# EAGLE board jumper_bed (EAGLE 9.6.2)
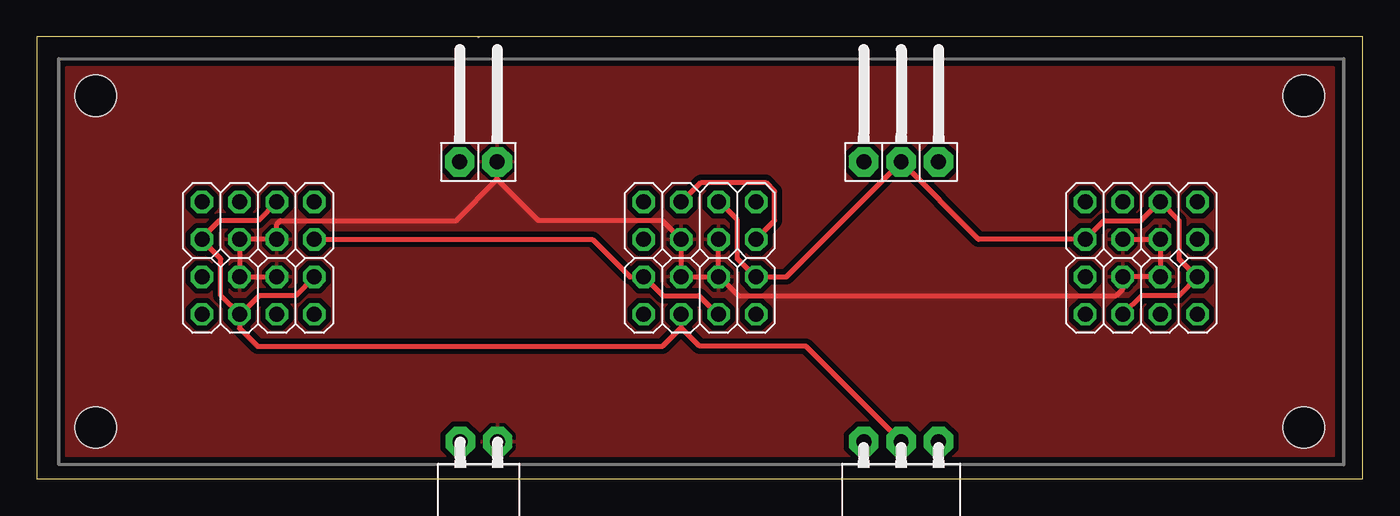
[diagram p0: board, top side]
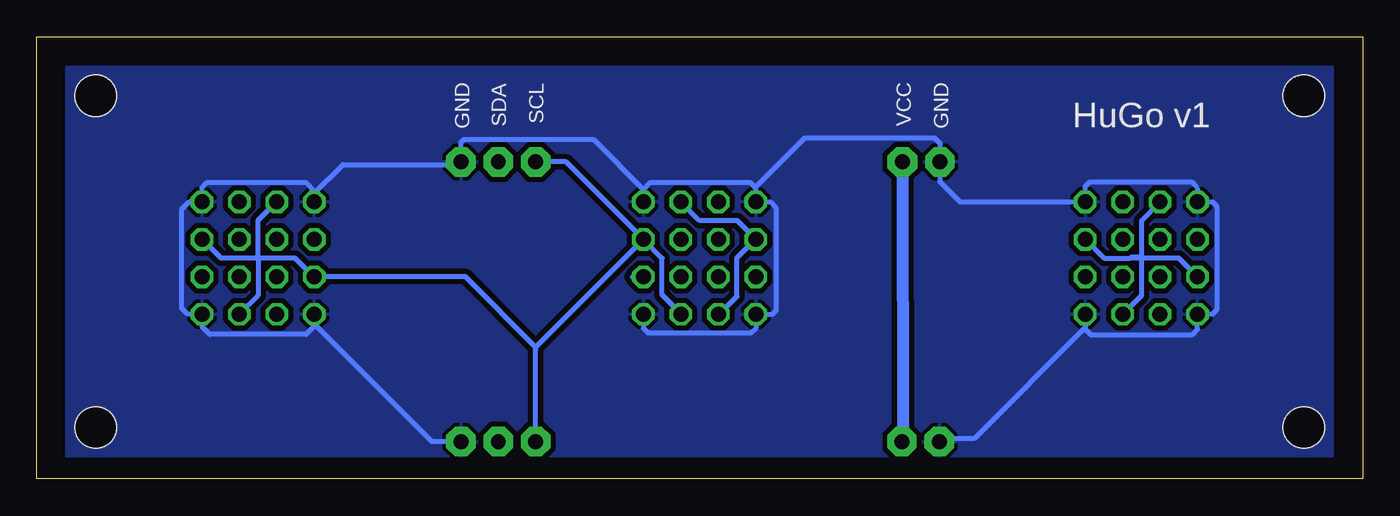
[diagram p1: board, bottom side, seen from below]

Size 90 x 30 mm. Coordinates in mm from the lower left corner, seen from the top.
Outline: 0,0 90,0 90,30 0,30 0,0
Copper layers (1*16): Top 0.035mm / dielectric 1.5mm / Bottom 0.035mm
Design rules "default *": minimum track width 14mil, minimum drill 0.35mm, track to track 14mil, track to pad 13mil, pad to pad 14mil, via to via 14mil, smd to smd 14mil, copper to edge 0mil, drill to drill 15mil, minimum pad ring 10mil, minimum via ring 8mil, stop-mask expansion 4mil, vias tented up to drill 0mil, thermal gap 10mil
Holes 2.8 mm at 86,3.5 86,26 4,26 4,3.5

## Footprints (pad centres in the part's own frame; a part is rotated, then mirrored left to right if it is on the bottom)
2X04 = drill 1.016 octagon: 1 -3.81,-1.27; 2 -3.81,1.27; 3 -1.27,-1.27; 4 -1.27,1.27; 5 1.27,-1.27; 6 1.27,1.27; 7 3.81,-1.27; 8 3.81,1.27
1X02/90 = drill 1.016 pad 1.981 octagon: 1 -1.27,-3.81 | drill 1.016 pad 2.007 octagon: 2 1.27,-3.81
1X03/90 = drill 1.016 pad 1.981 octagon: 1 -2.54,-3.81; 2 0,-3.81; 3 2.54,-3.81
1X03/90F = drill 1.016 pad 1.981 octagon: 1 -2.54,0; 2 0,0; 3 2.54,0
1X02/90F = drill 1.016 pad 1.981 octagon: 1 -1.31,0; 2 1.23,0

## Placement (x,y rotation side)
JP1  [2X04]  15.02,17.53 180 top
JP2  [2X04]  15.02,12.45 180 top
JP3  [2X04]  45.01,17.53 180 top
JP4  [2X04]  45.01,12.45 180 top
JP5  [2X04]  74.98,17.53 180 top
JP6  [2X04]  74.98,12.45 180 top
JP7  [1X02/90]  29.97,25.32 0 top
JP8  [1X03/90]  58.67,25.32 0 top
JP9  [1X03/90F]  58.67,2.54 180 top
JP10  [1X02/90F]  29.97,2.54 180 top

## Library data of the parts
JP1-JP10 = pinhead2

## Nets
GND: JP1.1 JP1.7 JP2.2 JP2.8 JP3.1 JP3.7 JP4.2 JP4.8 JP5.1 JP5.7 JP6.2 JP6.8 JP7.1 JP8.3 JP9.1 JP10.2
SCL: JP1.2 JP1.5 JP2.4 JP2.7 JP3.2 JP3.5 JP4.4 JP4.7 JP5.2 JP5.5 JP6.4 JP6.7 JP8.1 JP9.3
SDA: JP1.3 JP1.8 JP2.1 JP2.6 JP3.3 JP3.8 JP4.1 JP4.6 JP5.3 JP5.8 JP6.1 JP6.6 JP8.2 JP9.2
VCC: JP1.4 JP1.6 JP2.3 JP2.5 JP3.4 JP3.6 JP4.3 JP4.5 JP5.4 JP5.6 JP6.3 JP6.5 JP7.2 JP10.1

## Tracks (layer width: path | path; a pad name or v marks a point on that pad's centre or on a via)
GND
  Bottom 0.356: JP3.7 41.2,19.74 41.58,20.12 48.34,20.12 48.82,19.63 | JP3.7 40.21,18.8 39.83,18.41 39.83,11.4 40.06,11.18 JP4.8 41.2,10.21 41.51,9.91 48.51,9.91 48.82,10.21 JP4.2 | JP10.2 28.65,2.74 26.36,2.74 18.85,10.26 18.83,10.3 JP2.2 18.83,10.17 18.41,9.75 11.61,9.75 11.21,10.15 JP2.8 10.2,11.18 9.91,11.47 9.91,18.5 10.2,18.8 JP1.7 11.21,19.68 11.36,19.92 11.56,20.12 18.57,20.12 18.83,19.85 JP1.1 27.33,18.8 28.73,20.19 28.7,20.19 JP7.1 28.68,22.76 29.06,23.14 37.87,23.14 41.2,19.81 JP3.7 | JP3.1 48.82,19.63 | 48.82,19.63 52.22,23.04 61.01,23.04 61.21,22.84 JP8.3 61.21,21.34 69.22,21.34 71.17,19.38 JP5.7 71.17,19.53 71.75,20.12 78.44,20.12 78.79,19.76 JP5.1 79.65,18.8 80.16,18.29 80.16,11.58 79.76,11.18 JP6.2 78.79,10.34 78.26,9.8 71.73,9.8 71.17,10.36 JP6.8 71.17,10.54 63.17,2.54 JP9.1
  pour Bottom: 2.01,27.97 88.04,27.97 88.04,1.52 2.01,1.52
SCL
  Top 0.356: JP4.4 46.15,11.23 44.93,12.45 42.49,12.45 41.22,13.72 JP4.7 | JP3.5 43.76,18.8 45.09,20.12 49.48,20.12 50.09,19.51 50.09,17.53 JP3.2 | 41.15,13.72 40.26,13.72 37.72,16.26 JP1.2 | 41.15,13.72 JP4.7 | JP4.7 41.2,13.66 | 41.15,13.61 41.15,13.72
  Bottom 0.356: 71.32,13.72 JP6.7 | JP5.5 73.74,18.8 74.98,17.55 74.98,14.99 | 74.98,14.99 77.5,14.99 78.72,16.2 JP5.2 | JP4.4 46.33,11.28 47.55,12.5 47.55,14.99 JP3.2 | JP2.7 12.48,14.99 15.77,14.99 | JP1.5 15.02,17.53 15.02,15.06 | JP2.4 15.02,12.45 15.02,15.06 | 15.77,14.99 15.69,15.06 15.02,15.06 | JP1.2 17.56,14.99 15.77,14.99 | JP6.4 74.98,12.45 74.98,14.99 | JP6.7 71.2,13.72 72.47,14.99 74.98,14.99 | 56.13,8.75 JP9.3 56.13,8.94 | JP6.7 71.14,13.74 60.92,13.74 56.13,8.95 56.13,8.94 | JP8.1 54.08,21.51 JP3.2 | JP3.2 56.13,8.94
SDA
  Top 0.356: JP6.6 73.72,11.16 75.01,12.45 77.52,12.45 JP6.1 78.75,13.72 77.52,14.94 77.52,17.53 JP5.3 76.22,18.8 74.95,17.53 72.44,17.53 JP5.8 63.93,16.26 JP8.2 50.88,13.72 JP4.1 48.77,13.72 47.55,14.94 47.55,17.58 46.33,18.8 JP3.3 | 43.74,10.31 JP4.6 43.74,10.27 | JP2.6 13.75,10.22 14.98,8.99 42.46,8.99 43.74,10.27 | JP2.1 17.56,12.45 15.11,12.45 13.84,11.18 JP2.6 | JP2.6 12.48,12.45 12.48,14.93 11.21,16.2 JP1.8 11.21,16.35 12.39,17.53 15.02,17.53 JP1.3 | 43.74,10.27 44.99,9.02 52.2,9.02 JP9.2
  Bottom 0.356: 13.78,11.18 JP2.6 | 49.58,13.72 JP4.1 | JP4.6 43.69,11.18 42.47,12.39 42.47,15.01 41.22,16.26 JP3.8 41.2,16.27 42.45,17.53 45.01,17.53 JP3.3
VCC
  Top 0.356: JP2.5 JP1.6 JP1.4 16.29,17.3 16.52,17.53 28.45,17.53 31.24,20.32 | JP2.5 | JP2.5 JP2.3 | 31.24,20.32 31.25,20.33 | 31.24,20.32 JP7.2 | JP5.6 JP5.4 JP6.3 JP6.5 73.71,12.88 73.28,12.45 47.62,12.45 46.35,13.72 JP4.3 | JP4.3 JP4.5 JP3.6 42.47,17.53 34.04,17.53 31.25,20.32 31.24,20.32 | JP4.3 JP3.4
  Bottom 0.406: 31.22,2.61 JP10.1
  Bottom 0.813: JP7.2 31.22,2.61
  pour Top: 2.01,27.97 88.04,27.97 88.04,1.52 2.01,1.52

## Text on the board
bNames: GND | VCC | SCL | SDA | GND | HuGo v1